# Altium PCB rotary_table_v2.pcbdoc
Units mm, origin at the board's own origin, x right, y up, seen from the top; angles counter-clockwise.
Board outline 101.6 x 53.34 mm, 2 copper layers (Top Layer, Bottom Layer); 41 components, 25 nets, 181 pads, 24 vias.
Unrouted connection lines stored in the file: 26.
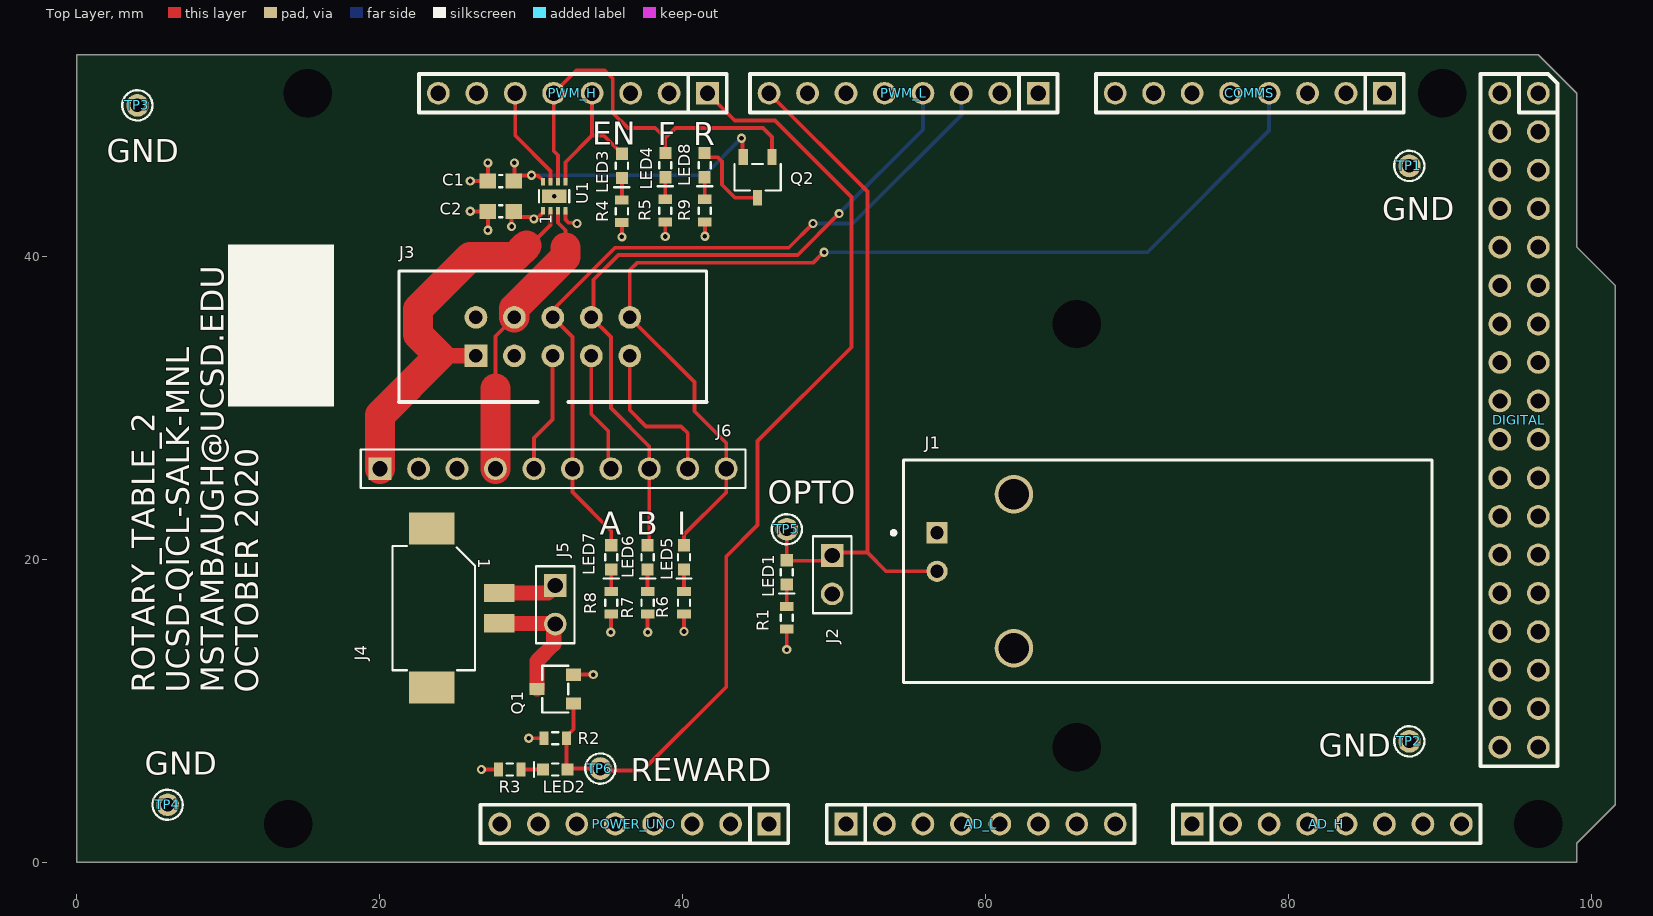
[diagram p0: Top Layer view]
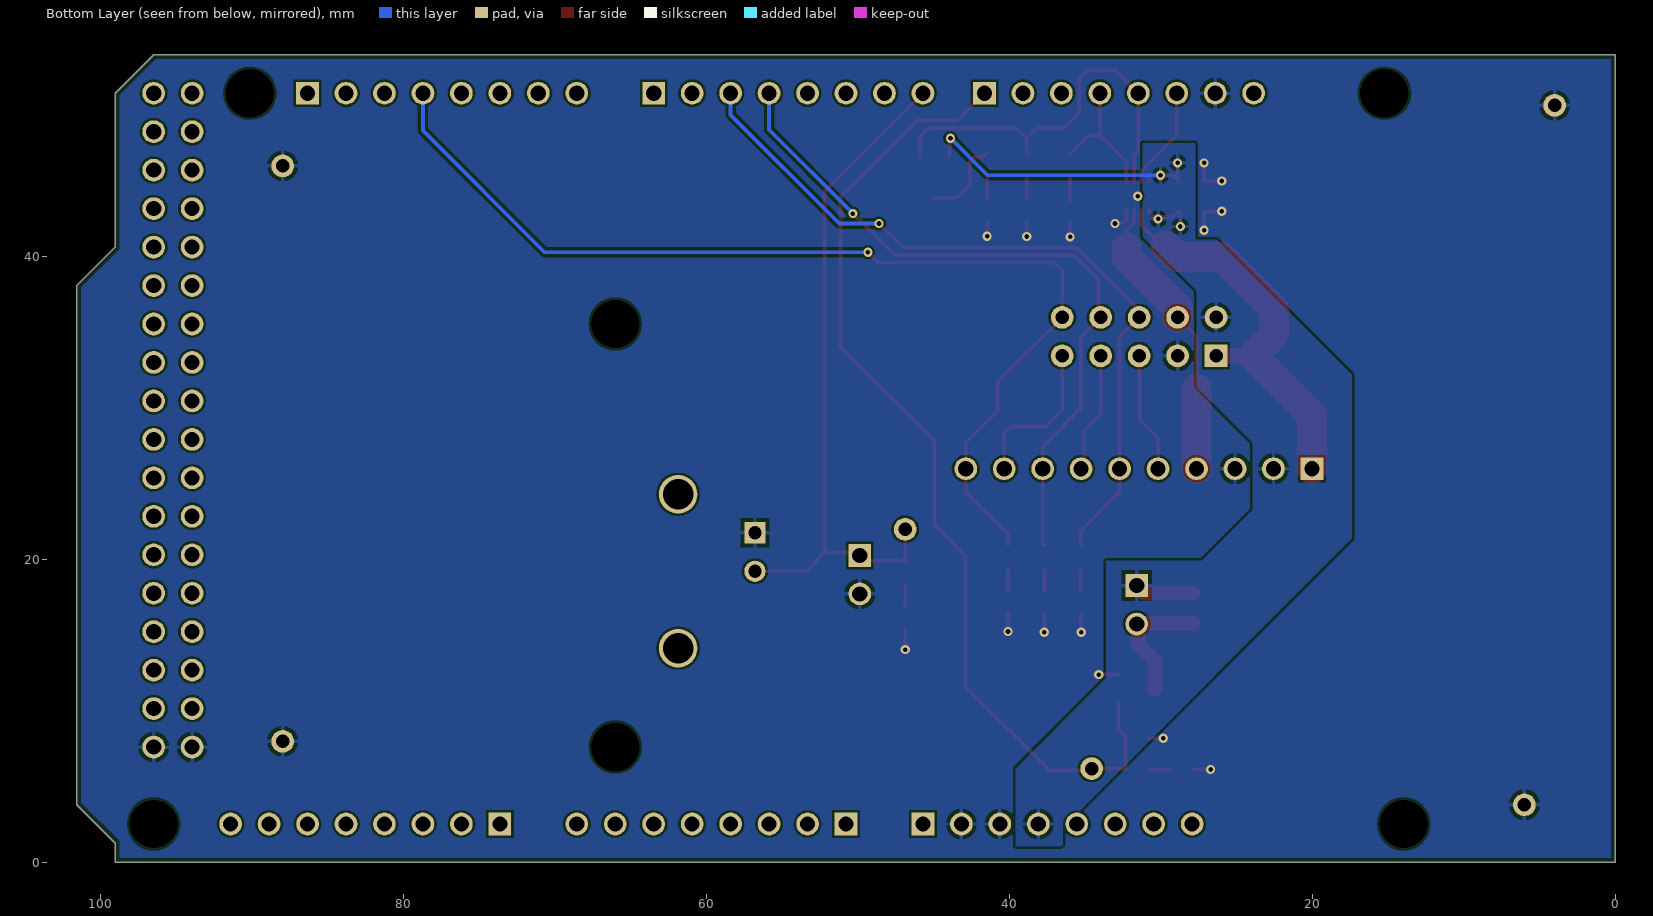
[diagram p1: Bottom Layer view, seen from below]

## Layer stack, top to bottom
Top Solder: solder mask 0.0102, Solder Resist, Dk 3.5
Top Layer: signal copper 0.0356
Dielectric1: dielectric 0.32, FR-4, Dk 4.8
Bottom Layer: signal copper 0.0356
Bottom Solder: solder mask 0.0102, Solder Resist, Dk 3.5

## Board outline
0,0 0,53.34 96.52,53.34 99.06,50.8 99.06,40.64 101.6,38.1 101.6,3.81 99.06,1.27 99.06,0

## Design rules (kind name [scope] priority, off if disabled: settings)
BoardOutlineClearance [All] p1: gap=0 ignorepadtopadclearanceinfootprint=FALSE except(0.3: Arc-OutlineEdge Track-OutlineEdge SMDPad-OutlineEdge THPad-OutlineEdge Via-OutlineEdge Fill-OutlineEdge Poly-OutlineEdge Region-OutlineEdge Text-OutlineEdge)
Clearance [All] p1: gap=0.152 ignorepadtopadclearanceinfootprint=FALSE except(0.2: Arc-Fill Arc-Poly Arc-Region Track-Fill Track-Poly Track-Region)
ComponentClearance [All] p1: gap=0.254 collisioncheckmode=3 verticalgap=0.01 showdistances=FALSE
HoleSize [All] p1: absolutevalues=TRUE maxlimit=5 minlimit=0.025 maxpercent=80.000 minpercent=20.000
MinimumSolderMaskSliver [All] p1: minsoldermaskwidth=0.127
PolygonConnect PolygonConnect_1 [InNet('GND')] p1: thpad.connectstyle=Relief thpad.reliefconductorwidth=0.254 thpad.reliefentries=4 thpad.polygonreliefangle="90 Angle" thpad.airgapwidth=0.254 smdpad.connectstyle=Relief smdpad.reliefconductorwidth=0.254 smdpad.reliefentries=4 smdpad.polygonreliefangle="90 Angle" smdpad.airgapwidth=0.254 via.connectstyle=Direct via.reliefconductorwidth=0.254 via.reliefentries=4 via.polygonreliefangle="90 Angle" via.airgapwidth=0.254
PolygonConnect [All] p2: connectstyle=Relief reliefconductorwidth=0.254 reliefentries=4 polygonreliefangle="90 Angle" airgapwidth=0.254
RoutingVias [All] p1: holewidth=0.711 width=1.27 viastyle="Through Hole" minholewidth=0.305 minwidth=0.61 maxholewidth=0.711 maxwidth=1.27
SilkToSilkClearance [All] p1: silktosilkclearance=0.01
SilkToSolderMaskClearance [IsPad] p1: minsilkscreentomaskgap=0.01 clearancetoexposedcopper=TRUE
SolderMaskExpansion [All] p1: expansion=0.102 istentingtop=FALSE
UnRoutedNet UnRoutedNet_1 [All] p1:
Width [All] p1: maxlimit=3 minlimit=0.152 preferedwidth=0.254
24 further rules are at their usual default settings.

## Components (designator, comment, footprint, x,y, rotation, side; value= is the part's Value field where it differs from the comment)
AD_H "AD_H" "Header 8x1 8.5mm" 73.66,2.54 r0 top locked
AD_L "AD_L" "Header 8x1 8.5mm" 50.8,2.54 r0 top locked
C1 "100nF" C0603 28,45 r0 top
C2 "100nF" C0603 28,43 r0 top
COMMS "Communication" "Header 8x1 8.5mm" 86.36,50.8 r180 top
DIGITAL "IO_36" "HEADER 36X 8MM" 96.52,50.8 r270 top locked
J1 "1-1337543-0" TECO-1-1337543-0_V 61.89,19.23 r270 top
J2 "0.1in 2x1" HEADER_2x1 49.89,19.008 r270 top
J3 "D2510-6002-AR" D2510-6002 26.36,33.46 r0 top
J4 "DF3EA-2P-2V(21)" DF3EA-2P-2V(21) 24.6,16.8 r270 top
J5 "0.1in 2x1" HEADER_2x1 31.6,17.014 r270 top
J6 "0.1in 10x1" HEADER_10x1 31.46,26 r0 top
LED1 "Green" LED0603 46.89,19.158 r270 top
LED2 "Green" LED0603 31.6,6.14 r180 top
LED3 "Green" LED0603 36,46 r270 top
LED4 "Green" LED0603 38.868,46.05 r270 top
LED5 "Green" LED0603 40.1,20.15 r270 top
LED6 "Green" LED0603 37.7,20.15 r270 top
LED7 "Green" LED0603 35.3,20.15 r270 top
LED8 "Green" LED0603 41.468,46.05 r270 top
POWER_UNO "POWER_UNO" "Header 8x1 8.5mm" 45.72,2.54 r180 top locked
PWM_H "PWM_H" "Header 8x1 8.5mm" 41.656,50.8 r180 top locked
PWM_L "PWM_L" "Header 8x1 8.5mm" 63.5,50.8 r180 top locked
Q1 "DMN1019" SC59-3 31.6,11.45 r90 top
Q2 "SI2305" SOT23-3 44.962,45.25 r0 top
R1 "Resistor" R0603 46.89,16.158 r270 top value=10K
R2 "Resistor" R0603 31.6,8.2 r180 top value=10K
R3 "Resistor" R0603 28.6,6.14 r180 top value=10K
R4 "Resistor" R0603 36,43 r270 top value=10K
R5 "Resistor" R0603 38.868,43.05 r270 top value=10K
R6 "Resistor" R0603 40.1,17.15 r270 top value=10K
R7 "Resistor" R0603 37.7,17.15 r270 top value=10K
R8 "Resistor" R0603 35.3,17.15 r270 top value=10K
R9 "Resistor" R0603 41.468,43.05 r270 top value=10K
TP1 "GND" TP_0IN1 88,46 r0 top
TP2 "GND" TP_0IN1 88,8 r0 top
TP3 "GND" TP_0IN1 4,50 r0 top
TP4 "GND" TP_0IN1 6,3.81 r0 top
TP5 "OPTO" TP_0IN1 46.89,22.004 r180 top
TP6 "REWARD" TP_0IN1 34.576,6.2 r90 top
U1 "DRV8838DSGR" WSON-8_PAD 31.532,44 r90 top

## Footprints (in the part's own frame and the unit in brackets; to place one, negate y for a bottom-side part, rotate by r counter-clockwise, add the part's x,y. Pads: shape width x height; smd on the part's side, far side on the other; paste and mask are expansions set on the pad)
C0603 [mm] "Chip Capacitor; Body 1.6 x 0.8 mm (LxW typ)"
  rect 1.1x1 smd: 1(-0.85,0) 2(0.85,0)
  silkscreen extent -0.1,-0.4 0.1,0.4, body extent -0.8,-0.4 0.8,0.4, height 0.8
D2510-6002 [mm]
  rect 1.5x1.5 hole 0.9: 1(0,0)
  round 1.5 hole 0.9: 2(0,2.54) 3(2.54,0) 4(2.54,2.54) 5(5.08,0) 6(5.08,2.54) 7(7.62,0) 8(7.62,2.54) 9(10.16,0) 10(10.16,2.54)
  silkscreen extent -5.08,-3.05 15.24,5.59, body extent -4.91,-2.85 15.11,5.79, height 9.92
DF3EA-2P-2V(21) [mm] "CONN HEADER SMD 2POS 2MM"
  rect 1.2x2 smd paste+0 mask+0: 1(-1,3.3) 2(1,3.3)
  rect 2.1x3 smd paste+0 mask+0: M1(-5.25,-1.15) M2(5.25,-1.15)
  silkscreen extent -4.1,-3.75 4.1,1.7, body extent -5.75,-3.75 5.75,3.85, height 6.75
"Header 8x1 8.5mm" [mm] "Stackable 8 pin header"
  rect 1.5x1.5 hole 1: 1(0,0)
  round 1.5 hole 1: 2(2.54,0) 3(5.08,0) 4(7.62,0) 5(10.16,0) 6(12.7,0) 7(15.24,0) 8(17.78,0)
  silkscreen extent -1.27,-1.27 19.05,1.27, body extent -1.27,-1.27 19.05,1.27, height 8.5
"HEADER 36X 8MM" [mm] "Stackable 10 pin header"
  round 1.5 hole 1: 1(0,0) 2(0,-2.54) 3(2.54,0) 4(2.54,-2.54) 5(5.08,0) 6(5.08,-2.54) 7(7.62,0) 8(7.62,-2.54) 9(10.16,0) 10(10.16,-2.54) 11(12.7,0) 12(12.7,-2.54) 13(15.24,0) 14(15.24,-2.54) 15(17.78,0) 16(17.78,-2.54) 17(20.32,0) 18(20.32,-2.54) 19(22.86,-2.54) 20(22.86,0) 21(25.4,0) 22(25.4,-2.54) 23(27.94,0) 24(27.94,-2.54) 25(30.48,0) 26(30.48,-2.54) 27(33.02,0) 28(33.02,-2.54) 29(35.56,0) 30(35.56,-2.54) 31(38.1,0) 32(38.1,-2.54) 33(40.64,0) 34(40.64,-2.54) 35(43.18,0) 36(43.18,-2.54)
  silkscreen extent -1.27,-3.81 44.45,1.27, body extent -1.27,-3.81 44.45,1.27, height 8.5
HEADER_2x1 [mm] "2x1 0IN1 2MM54 spacing"
  rect 1.5x1.5 hole 1: 1(-1.27,0)
  round 1.5 hole 1: 2(1.27,0)
  silkscreen extent -2.54,-1.27 2.54,1.27
HEADER_10x1 [mm] "10x1 0IN1 2MM54 spacing"
  rect 1.5x1.5 hole 1: 1(-11.43,0)
  round 1.5 hole 1: 2(-8.89,0) 3(-6.35,0) 4(-3.81,0) 5(-1.27,0) 6(1.27,0) 7(3.81,0) 8(6.35,0) 9(8.89,0) 10(11.43,0)
  silkscreen extent -12.7,-1.27 12.7,1.27
LED0603 [mm] "0603 w/ LED mark"
  rect 0.8x0.8 smd: 1(0.8,0) 2(-0.8,0)
  silkscreen extent -0.2,-0.5 1.4,0.5, body extent -0.8,-0.35 0.8,0.35, height 0.7
R0603 [mm]
  rect 0.6x0.9 smd: 1(-0.75,0) 2(0.75,0)
  silkscreen extent -0.2,-0.4 0.2,0.4, body extent -0.8,-0.4 0.8,0.4, height 0.45
SC59-3 [mm] "alternative to SOT23-3"
  rect 0.8x1 smd: 1(-0.95,-1.2) 2(0.95,-1.2) 3(0,1.2)
  silkscreen extent -1.55,-0.85 1.55,0.85, body extent -1.55,-0.85 1.55,0.85, height 1.3
SOT23-3 [mm]
  rect 0.6x1.05 smd: 1(0.95,1.35) 2(-0.95,1.35) 3(0,-1.35)
  silkscreen extent -1.52,-0.87 1.53,0.87, body extent -1.55,-0.85 1.55,0.85, height 1
TECO-1-1337543-0_V [mm] "SMD, 2-Leads, Body 34.9x14.7mm, Pitch 2.54mm"
  rect 1.4x1.4 hole 0.89: 1(-2.54,-5.08)
  round 1.4 hole 0.89: 2(0,-5.08)
  round 2.55 hole 2.01: MH1(-5.08,0) MH2(5.08,0)
  silkscreen extent -7.35,-8.07 7.35,27.6, body extent -7.35,-7.1 7.35,28.05, height 15.8
TP_0IN1 [mm] "tenth-inch header as a testpoint"
  round 1.5 hole 0.9: 1(0,0)
  silkscreen extent -1,-1 1,1
WSON-8_PAD [mm] "2x2x0.8mm 8pins SMD + center pad"
  rect 0.5x0.27 smd mask+0.05: 1(-0.95,0.75) 2(-0.95,0.25) 3(-0.95,-0.25) 4(-0.95,-0.75) 5(0.95,-0.75) 6(0.95,-0.25) 7(0.95,0.25) 8(0.95,0.75)
  rect 0.9x1.6 smd mask+0.05: PAD(0,0)
  silkscreen extent -0.4,-1 0.4,1, body extent -1,-1 1,1, height 0.8

## Part data
AD_H PWM_L: Supplier Part Number 1=2698940, Supplier 1=Arrow, Supplier 2=Arrow, Supplier 3=Digi-Key, Supplier 4=Arrow, Supplier Part Number 2=2698939, Supplier Part Number 3=SAM1198-08-ND, Supplier Part Number 4=2698925
AD_L COMMS PWM_H: Supplier Part Number 1=SAM1198-08-ND, Supplier 1=Digi-Key, Supplier 2=Arrow, Supplier 3=Arrow, Supplier 4=Arrow
  AD_L: Supplier 5=Arrow, Supplier Part Number 2=2698939, Supplier Part Number 3=2698940, Supplier Part Number 4=43085273, Supplier Part Number 5=2698925
  COMMS PWM_H: Supplier Part Number 2=2698940, Supplier Part Number 3=2698939, Supplier Part Number 4=2698925
C1 C2: library part CAP, "Nonpolarized capacitor", DigikeyPartNumber=1276-CL10B104KC8VPNCCT-ND, Manufacturer=Samsung, MfgPartNumber=CL10B104KC8VPNC, Package=C0603, VoltageRating=25V
DIGITAL: Supplier Part Number 1=SAM1196-18-ND, Supplier 1=Digi-Key, Supplier 2=Arrow, Supplier 3=Arrow, Supplier 4=Arrow, Supplier 5=Arrow, Supplier Part Number 2=48117090, Supplier Part Number 3=46093326, Supplier Part Number 4=2698278, Supplier Part Number 5=2698268
J1: library part CMP-2000-05853-1, "Female Connector, Pitch 2.54 mm, 1 x 2 Position, Height 15.8 mm, Tail Length 3.8 mm,  / -55 to 85 degC, RoHS, Bulk", DigikeyPartNumber=A97553-ND, Frequency Max=4GHz, Manufacturer="TE Connectivity", Package Description="Female Connector, Pitch 2.54 mm, 1 x 2 Position, Height 15.8 mm, Tail Length 3.8 mm", Coaxial Cable Types=-, Coaxial Termination=Solder, Connector Body Style=RightAngleJack, Connector Mounting=PCBMount, Connector Type=BNCCoaxial, Contact Material=Brass, Contact Plating=GoldPlatedContacts, Datasheet URL=http://www.te.com/commerce/DocumentDelivery/DDEController?Action=showdoc&DocId=Customer+Drawing%7F1337543%7FG%7Fpdf%7FEnglish%7FENG_CD_1337543_G.pdf%7F1-1337543-0, Datasheet Version="Rev. G, 12/2012", Impedance=50ohm, Manufacturer URL=http://www.te.com/, Mounting Technology=ThroughHole, Package Reference=1-1337543-0, Product Range=-, SVHC=ToBeAdvised
J2 J5: library part HEADER_2x1, "0.1in header 2x1", Gender=Male, Package=HEADER_2x1
J3: "CONN HEADER 10POS VERT 10GOLD", Color=Black, DigikeyPartNumber=MHC10E-ND, Manufacturer=3M, Category="Connectors, Interconnects", ComponentLink1Description=http://multimedia.3m.com/mws/mediawebserver?66666UuZjcFSLXTtm8T_oxMcEVuQEcuZgVs6EVs6E666666--, ComponentLink1URL=http://multimedia.3m.com/mws/mediawebserver?66666UuZjcFSLXTtm8T_oxMcEVuQEcuZgVs6EVs6E666666--, Connector Type="Header, Shrouded", Contact Finish=Gold, Contact Finish Thickness="10µin (0.25µm)", Contact Mating Length="0.243\" (6.17mm)", Contact Type="Male Pin", Fastening Type=-, Features=-, Manufacturer Part Number=D2510-6002-AR, Mounting Type="Through Hole", Number of Positions=10, Number of Positions Loaded=All, Number of Rows=2, Packaging=Bulk, Pitch="0.100\" (2.54mm)", Pricing 1="1=1.57, 10=1.421, 50=1.276, 100=1.218, 250=1.102, 500=1.015, 1000=0.87, 2500=0.812, 5000=0.7714 (USD)", RoHS="RoHS Compliant", Row Spacing="0.100\" (2.54mm)", Stock 1=1435, Supplier 1=Digi-Key, Supplier 2=Digi-Key, Supplier Part Number 1=MHC10E-ND, Supplier Part Number 2=PCD1760CT-ND, Termination=Solder
J4: "CONN HEADER SMD 2POS 2MM", DigikeyPartNumber=H125461CT-ND, Manufacturer=Hirose, MfgPartNumber=DF3EA-2P-2V(21)
J6: library part HEADER_10x1, "0.1in header 10x1", Gender=Male, Package=HEADER_10x1
LED1 LED2 LED3 LED4 LED5 LED6 LED7 LED8: library part LED, "LED", DigikeyPartNumber=732-4980-1-ND, Manufacturer="Wurth Elektronik", MfgPartNumber=150060VS75000, Package=LED0603, Color=Green
POWER_UNO: Supplier Part Number 1=2698925, Supplier 1=Arrow, Supplier 2=Digi-Key, Supplier 3=Arrow, Supplier Part Number 2=SAM1198-08-ND, Supplier Part Number 3=2698940
Q1: library part DMN1019UVT, "MOSFET N-CH 12V 9.3A SC59", DigikeyPartNumber=DMN1019USN-7DICT-ND, Manufacturer="Diodes Incorporated", MfgPartNumber=DMN1019USN-7, Ron="13m-ohm at 1.8V", Vds max=12V
Q2: "P-CHANNEL MOSFET, SOT-23 PACKAGE", DigikeyPartNumber=SI2305-TPMSCT-ND, Manufacturer="Micro Commercial Co", MfgPartNumber=SI2305-TP, Rds="90mohm @ Vgs = -1.8V", VDS=-8V
R1 R2 R3 R4 R5 R6 R7 R8 R9: library part RES, DigikeyPartNumber=RMCF0603FT10K0CT-ND, Manufacturer=Stackpole, MfgPartNumber=RMCF0603FT10K0, Tolerance=1%
TP1 TP2 TP3 TP4 TP5 TP6: library part TP_0IN1, "hole for 0.1in header. No BOM item."
U1: "IC BRIDGE DRIVER PAR 8WSON", DigikeyPartNumber=296-40081-1-ND, Manufacturer="Texas Instruments", MfgPartNumber=DRV8838DSGR

## Free pads (board coordinates)
  round 1.6 hole 3.2: 0(13.97,2.54) 0(15.24,50.8) 0(66.04,7.62) 0(66.04,35.56) 0(90.17,50.8) 0(96.52,2.54)

## Via types
v1: diameter 0.61, hole 0.305, Top Layer to Bottom Layer, tented both sides, 24 vias

## Nets (pads, with @x,y where several pads share a name; then routed paths per layer and width w, separated by ;. In a path a pad name is that pad's centre, name@x,y a point inside that pad or via, vN(x,y) a via of type N, cw(c..) or ccw(c..) an arc to the next point about the centre after c; other vN are vias at no path point)
5V: AD_L.2 C1.2 C2.2 J3.2 J4.1 J5.1 J6.2 POWER_UNO.4 Q2.2 U1.1 U1.8 | length 27
  Top Layer w0.254: v1(28.717,42) 28.717,42.867 C2.2 29.223,42.627 29.967,42.627 30.094,42.5 v1(30.19,42.5) 30.347,42.5 30.782,42.935 U1.1 ; C1.2 C1.2@28.9,45.05 ; v1(28.9,46.2) C1.2@28.9,45.05 ; U1.8 30.774,44.958 30.774,45.073 30.47,45.377 30.059,45.377 30.048,45.387 30.034,45.373 29.223,45.373 C1.2@28.9,45.05 ; v1(43.9,47.832) 43.956,47.776 43.956,46.656 Q2.2
  Top Layer w1: J4.1 31.116,17.8 J5.1
  Bottom Layer w0.254: v1(30.032,45.381) 41.449,45.381 v1(43.9,47.832)
ENC_CHA: DIGITAL.14 J3.6 J6.6 LED7.2 PWM_L.3 | length 50.9
  Top Layer w0.254: LED7.2 35.3,21.9 32.73,24.47 J6.6 32.73,34.71 J3.6 31.678,36.238 31.678,36.729 35.547,40.597 47.022,40.597 v1(48.62,42.195)
  Bottom Layer w0.254: v1(48.62,42.195) 51.245,42.195 58.42,49.37 PWM_L.3
ENC_CHAn: J3.5 J6.5 POWER_UNO.5 | length 8
  Top Layer w0.254: J6.5 30.19,28.036 31.41,29.256 31.41,33.43 J3.5
ENC_CHB: DIGITAL.18 J3.8 J6.8 LED6.2 PWM_L.4 | length 47.5
  Top Layer w0.254: LED6.2 37.81,21.06 J6.8 37.81,27.476 35.27,30.016 35.27,34.71 J3.8 34.131,36.151 34.131,38.481 35.771,40.122 47.617,40.122 v1(50.345,42.85)
  Bottom Layer w0.254: v1(50.345,42.85) 55.88,48.385 PWM_L.4
ENC_CHBn: DIGITAL.16 J3.7 J6.7 | length 8
  Top Layer w0.254: J3.7 33.98,29.62 35.1,28.5 35.1,26.17 J6.7
ENC_CHI: COMMS.4 J3.10 J6.10 LED5.2 | length 70.5
  Top Layer w0.254: LED5.2 40.1,21.65 42.89,24.44 J6.10 42.89,27.71 40.8,29.8 40.8,31.72 J3.10 36.52,39.127 36.993,39.6 48.615,39.6 49.315,40.3 v1(49.352,40.3)
  Bottom Layer w0.254: v1(49.352,40.3) 70.7,40.3 78.74,48.34 COMMS.4
ENC_CHIn: J3.9 J6.9 | length 10.4
  Top Layer w0.254: J3.9 36.52,29.88 37.6,28.8 39.9,28.8 40.35,28.35 J6.9
GND: AD_L.3 C1.1 C2.1 DIGITAL.35 DIGITAL.36 J1.1 J2.2 J3.3 J6.3 POWER_UNO.2 POWER_UNO.3 PWM_H.7 Q1.2 R1.2 R2.2 R3.2 R4.2 R5.2 R6.2 R7.2 R8.2 R9.2 TP1.1 TP2.1 TP3.1 TP4.1 U1.4 U1.PAD | length 17.4
  Top Layer w0.254: v1(25.99,43) C2.1 v1(27.15,41.75) ; v1(25.99,45) C1.1 v1(27.15,46.2) ; v1(26.72,6.14) R3.2 ; v1(29.85,8.2) R2.2 ; U1.4 32.282,42.45 32.482,42.25 32.982,42.25 v1(33.032,42.2) ; Q1.2 32.809,12.409 v1(34.11,12.409) ; v1(35.27,15.2) 35.27,16.37 R8.2 ; v1(36,41.31) R4.2 ; v1(37.7,15.2) R7.2 ; v1(38.868,41.335) R5.2@38.868,42.3 ; v1(40.1,15.25) R6.2 ; R9.2 41.484,42.284 v1(41.484,41.36) ; v1(46.89,14.058) R1.2
  other v1: 31.532,44
Motor+: AD_L.1 J3.1 J6.1 U1.2 | length 27.2
  Top Layer w0.254: 29.7,40.745 29.928,40.745 31.282,42.1 U1.2
  Top Layer w1: 23.94,33.46 J3.1
  Top Layer w2: J6.1 20.03,29.55 23.94,33.46 22.528,34.872 22.528,36.528 25.99,39.99 28.944,39.99 29.7,40.745
Motor-: J3.4 J6.4 U1.3 | length 18.7
  Top Layer w0.254: 27.65,31.3 27.65,34.75 J3.4 ; U1.3 31.782,42.25 32.282,41.75 32.282,41.05
  Top Layer w2: J6.4 27.65,31.3 ; J3.4 28.9,36.608 32.282,39.99 32.282,40.597
MOTOR_EN: LED3.2 PWM_H.4 U1.5 | length 9
  Top Layer w0.254: U1.5 32.282,46.246 34.036,48 ; PWM_H.4 34.036,48 ; LED3.2 34.8,48 34.036,48
MOTOR_PH: LED4.2 PWM_H.5 Q2.1 U1.6 | length 27
  Top Layer w0.254: U1.6 31.778,44.954 31.778,46.704 31.496,46.986 PWM_H.5 31.496,50.814 32.982,52.3 34.87,52.3 35.4,51.77 35.4,49.5 36.4,48.5 38.2,48.5 38.868,47.832 ; LED4.2 38.868,47.832 ; Q2.1 45.912,47.9 45.312,48.5 39.535,48.5 38.868,47.832
MOTOR_SLEEPn: PWM_H.6 U1.7 | length 6.8
  Top Layer w0.254: PWM_H.6 28.956,48 31.282,45.674 U1.7
NetJ4_2: J4.2 J5.2 Q1.3 | length 8.5
  Top Layer w1: J4.2 27.928,15.772 31.572,15.772 J5.2 31.504,15.648 31.504,14.415 30.4,13.311 Q1.3
NetLED1_1: LED1.1 R1.1 | length 1.4
  Top Layer w0.254: R1.1 LED1.1
NetLED2_1: LED2.1 R3.1 | length 1.5
  Top Layer w0.254: R3.1 LED2.1
NetLED3_1: LED3.1 R4.1 | length 1.4
  Top Layer w0.254: R4.1 LED3.1
NetLED4_1: LED4.1 R5.1 | length 1.4
  Top Layer w0.254: R5.1 LED4.1
NetLED5_1: LED5.1 R6.1 | length 1.4
  Top Layer w0.254: R6.1 LED5.1
NetLED6_1: LED6.1 R7.1 | length 1.4
  Top Layer w0.254: R7.1 LED6.1
NetLED7_1: LED7.1 R8.1 | length 1.5
  Top Layer w0.254: R8.1 LED7.1
NetLED8_1: LED8.1 R9.1 | length 1.4
  Top Layer w0.254: R9.1 LED8.1
NetLED8_2: LED8.2 Q2.3 | length 5.6
  Top Layer w0.254: LED8.2 41.741,46.577 42.323,46.577 42.6,46.3 42.6,44.759 43.459,43.9 Q2.3
TRIGGER_OPTO: J1.2 J2.1 LED1.2 PWM_L.8 TP5.1 | length 45.7
  Top Layer w0.254: PWM_L.8 52.21,44.31 52.21,20.46 ; LED1.2@46.89,19.93 49.36,19.93 49.89,20.46 52.21,20.46 ; LED1.2 TP5.1 ; J1.2 53.44,19.23 52.21,20.46
TRIGGER_REWARD: LED2.2 PWM_H.1 Q1.1 R2.1 TP6.1 | length 65.7
  Top Layer w0.254: Q1.1 32.8,8.8 32.35,8.35 R2.1 32.35,6.19 LED2.2 32.46,6.2 TP6.1 34.706,6.07 37.37,6.07 42.89,11.59 42.89,20.214 44.962,22.286 44.962,27.825 51.16,34.023 51.16,43.94 46.1,49 43.456,49 PWM_H.1 ; TP6.1@34.193,6.583 TP6.1@34.338,6.438
pads on no net: AD_H.1 AD_H.2 AD_H.3 AD_H.4 AD_H.5 AD_H.6 AD_H.7 AD_H.8 AD_L.4 AD_L.5 AD_L.6 AD_L.7 AD_L.8 COMMS.1 COMMS.2 COMMS.3 COMMS.5 COMMS.6 COMMS.7 COMMS.8 DIGITAL.1 DIGITAL.2 DIGITAL.3 DIGITAL.4 DIGITAL.5 DIGITAL.6 DIGITAL.7 DIGITAL.8 DIGITAL.9 DIGITAL.10 DIGITAL.11 DIGITAL.12 DIGITAL.13 DIGITAL.15 DIGITAL.17 DIGITAL.19 DIGITAL.20 DIGITAL.21 DIGITAL.22 DIGITAL.23 DIGITAL.24 DIGITAL.25 DIGITAL.26 DIGITAL.27 DIGITAL.28 DIGITAL.29 DIGITAL.30 DIGITAL.31 DIGITAL.32 DIGITAL.33 DIGITAL.34 J1.MH1 J1.MH2 J4.M1 J4.M2 POWER_UNO.1 POWER_UNO.6 POWER_UNO.7 POWER_UNO.8 PWM_H.2 PWM_H.3 PWM_H.8 PWM_L.1 PWM_L.2 PWM_L.5 PWM_L.6 PWM_L.7

## Polygon pours and split planes (outlines as drawn)
GND on Bottom Layer "GND_L02_P003" (solid, pour order 3): -1,54 104,54 104,-2 -1,-2
5V on Bottom Layer "5V_L02_P002" (solid, pour order 2): 27.75,47.5 31.16,47.5 31.21,47.55 31.21,41.31 30.591,40.691 27.65,37.75 27.65,31.42 25.03,28.8 23.94,27.71 23.94,23.3 27.31,19.93 33.6,19.93 33.6,12.2 39.6,6.2 39.6,1.076 36.5,1.076 36.5,2.3 17.4,21.4 17.4,32.208 26.317,41.125 27.75,41.125

## Silkscreen, mask and mechanical layers (free items; w line width, h text height)
Top Overlay:
  rectangle: 10.001,30.11 17.001,40.804
  text "EN" at 34.036,47.402 h1.52
  text "F" at 38.368,47.367 h1.52
  text "R" at 40.718,47.367 h1.52
  text "A" at 34.55,21.65 h1.52
  text "B" at 36.95,21.65 h1.52
  text "I" at 39.668,21.65 h1.52
  text "ROTARY_TABLE_2 / UCSD-QICL-SALK-MNL / MSTAMBAUGH@UCSD.EDU / OCTOBER 2020" at 12,11.2 h1.52 r90
Mechanical 1:
  circle w0.127: c96.52,2.54 r1.6
  circle w0.127: c90.17,50.8 r1.6
  circle w0.127: c66.04,35.56 r1.6
  circle w0.127: c13.97,2.54 r1.6
  circle w0.127: c66.04,7.62 r1.6
  circle w0.127: c15.24,50.8 r1.6
  lines w0.127: 0,0 0,53.34 96.52,53.34 99.06,50.8 99.06,40.64 101.6,38.1 101.6,3.81 99.06,1.27 99.06,0 0,0

## Text inside footprints (layer, text, board x,y; h text height)
J2: Mechanical 15 "1" at 48.9,21.28 h0.5 r270
J4: Top Overlay "1" at 26.5,20.1 h0.8 r270; Mechanical 15 "1" at 26.6,19.6 h0.5 r270
J5: Mechanical 15 "1" at 30.6,19.158 h0.5 r270
J6: Mechanical 15 "1" at 21.16,25.4 h0.5
Q2: Mechanical 15 "1" at 46.462,46.55 h0.5
U1: Top Overlay "1" at 31.38,42.126 h0.8 r90; Mechanical 15 "1" at 31.36,43.35 h0.5 r90